# Altium PCB rf_main.PcbDoc (part 3 of 3)
Units mil, origin at the board's own origin, x right, y up, seen from the top; angles counter-clockwise.
Board outline 7331.84 x 2609.86 mil, 2 copper layers (Top Layer, Bottom Layer); 310 components, 184 nets, 868 pads, 739 vias.
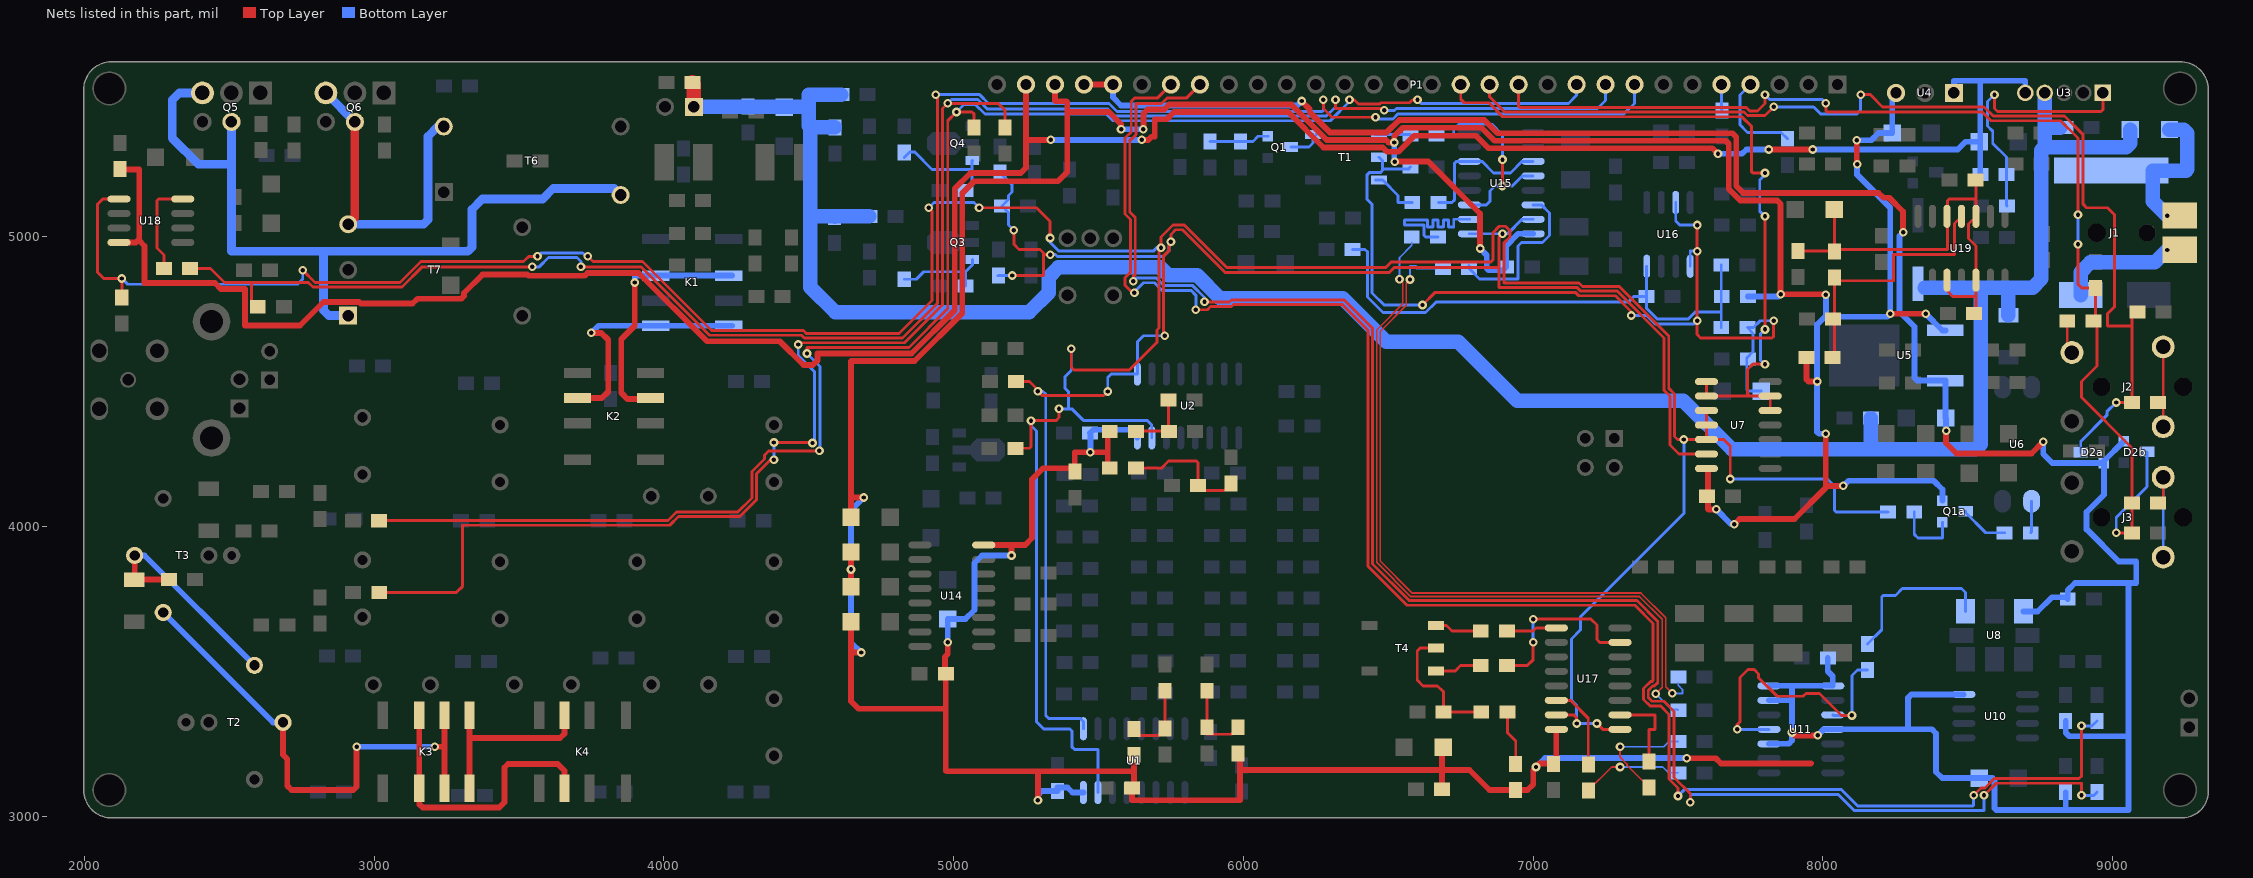
[diagram p3: the nets of this part, all layers, seen from the top]

## Via types
v1: diameter 30, hole 15, Top Layer to Bottom Layer, 739 vias

## Nets (pads, with @x,y where several pads share a name; then routed paths per layer and width w, separated by ;. In a path a pad name is that pad's centre, name@x,y a point inside that pad or via, vN(x,y) a via of type N, cw(c..) or ccw(c..) an arc to the next point about the centre after c; other vN are vias at no path point) (continued)
NetD6_1: D6.1 R61.1 T2.2 T3.3 | length 772.3
  Top Layer w20: T3.3@2174.09,3900 2174.09,3817.41 2291.67,3817.41 R61.1@2292.86,3816.22
  Bottom Layer w20: T3.3@2174.09,3900 2208.33,3900 T2.2@2587.48,3520.85
NetF1_2: F1.2 J1.1 P3.1 | length 491.2
  Bottom Layer w50: v1(9188,5072) 9138,5122 9138,5228.16 9254.16,5228.16 9258,5232 9258,5357.55 9245.78,5369.78 F1.2@9195.86,5369.78
NetJ1_3: J1.3 P3.2 | length 409.4
  Bottom Layer w50: J1.3@8889.83,4798.16 8889.83,4877.83 8923,4911 9145,4911 v1(9188,4954)
NetJ2_R: J2.R R15c.2 | length 116.3
  Top Layer w10: R15c.2@8843.14,4709.78 8843.14,4616.21 J2.R@8859.24,4600.11
NetJ2_T: J2.T R15d.2 | length 275.6
  Top Layer w10: J2.T@9174.2,4344.2 J2.T@9174.2,4619.8
NetJ3_T: J3.T R15b.2 | length 372.3
  Top Layer w10: R15b.2@9156.86,4080.22 9174.2,4097.57 J3.T@9174.2,4169.8
  Bottom Layer w10: J3.T@9174.2,3894.2 J3.T@9174.2,4169.8
NetK1_2: K1.2 K1.7 K2.3 | length 870.7
  Top Layer w20: v1(3900,4841.62) 3900,4693 3853,4646 3853,4461.26 3874.26,4440 3950.99,4440 K2.3@3953.98,4442.99
  Bottom Layer w20: v1(3900,4841.62) 3900,4865.62 K1.7@3972.02,4865.62 K1.2@4223.98,4865.62 K1.2@4235.8,4865.62
NetK1_4: K1.4 K1.5 K2.6 | length 857.9
  Top Layer w20: K2.6@3702.02,4442.99 3785.99,4442.99 3808,4465 3808,4644 3784,4668 v1(3750,4668)
  Bottom Layer w20: v1(3750,4668) 3774.39,4692.39 K1.5@3972.02,4692.39 K1.4@4223.98,4692.39 K1.4@4235.8,4692.39
NetK3_2: K3.2 K3.7 K4.6 | length 1038.4
  Top Layer w20: K3.7@3156.38,3359.8 K3.7@3156.38,3347.98 K3.2@3156.38,3096.02 3156.38,3041.62 3168,3030 3432,3030 3450,3048 3450,3168 3462,3180 3634,3180 3657.01,3156.99 K4.6@3657.01,3096.02 K4.6@3657.01,3084.2
NetK3_3: K3.3 K3.6 T2.3 T3.2 | length 1782.8
  Top Layer w20: T2.3@2685.91,3324 2685.91,3212.09 2700.86,3197.14 2700.86,3105 2715.63,3090.22 2928.22,3090.22 2940,3102 v1(2940,3240) ; v1(3210,3240) 3242.99,3240 ; K3.3@3242.99,3084.2 3242.99,3240 ; K3.6@3242.99,3359.8 3242.99,3240
  Bottom Layer w20: T3.2@2268,3698.63 T3.2@2272.52,3703.15 2651.67,3324 T2.3@2685.91,3324 T2.3@2685.91,3338.09 ; v1(2940,3240) v1(3210,3240)
NetK3_4: K3.4 K3.5 K4.3 | length 684
  Top Layer w20: K3.4@3329.61,3084.2 3329.61,3270 ; K3.5@3329.61,3359.8 3329.61,3270 ; K4.3@3657.01,3359.8 3657.01,3285.01 3642,3270 3329.61,3270
NetQ1_2: Q1.2 R38.2 R39.2 | length 206.4
  Bottom Layer w10: R39.2@5885.22,5328.86 R38.2@5990.22,5328.86 6032.86,5328.86 6050.39,5346.39 Q1.2@6084.34,5346.39
NetQ1_3: Q1.3 T1.6 | length 112
  Bottom Layer w10: Q1.3@6164.34,5309.39 6226.39,5309.39 6239.83,5322.83 T1.6@6239.83,5352.74 ; T1.6@6251.64,5352.74 T1.6@6252.38,5352
NetQ1a_1: Q1a.1 R15a.1 | length 234.1
  Bottom Layer w10: R15a.1@8315.14,4050.22 8315.14,3972.86 8328,3960 8412,3960 8412,4014.05 Q1a.1@8412.34,4014.39
NetQ1a_3: Q1a.3 R15.2 | length 170.1
  Bottom Layer w10: Q1a.3@8492.34,4052.39 8490.22,4050.28 8490.22,4049.78 8561.78,3978.22 R15.2@8627.14,3978.22
NetQ3_3: Q3.3 R77.2 R78.2 | length 322.9
  Bottom Layer w10: R78.2@4829.78,4853.14 4871.14,4853.14 4896.86,4878.86 5040.86,4878.86 ; R77.2@5040.86,4829.78 5040.86,4878.86 ; Q3.3@5064.93,4920.94 5064.93,4902.93 5040.86,4878.86
NetQ4_3: Q4.3 R79.2 R80.2 | length 380
  Bottom Layer w10: R80.2@4829.78,5273.14 4848.63,5292 4866,5292 4926,5232 5064,5232 ; R79.2@5040.86,5159.78 5064,5182.92 5064,5232 ; Q4.3@5064.93,5262.94 5064,5262.02 5064,5232
NetQ5_3: Q5.3 T6.2 T7.1 | length 2750.2
  Bottom Layer w30: Q5.3@2408,5496.06 2328.06,5496.06 2304,5472 2304,5340 2394,5250 2508,5250 ; Q5.3@2508,5396.06 2508,5250 ; T7.1@2910.88,4727.73 2844.27,4727.73 2826,4746 2826,4944 2832,4950 ; T6.2@3851.12,5143.89 3829.01,5166 3618,5166 3582,5130 3373.89,5130 3337.89,5094 3337.89,4963.89 3324,4950 2832,4950 ; 2508,5250 2508,4950 2832,4950
NetQ6_3: Q6.3 T6.3 T7.3 | length 1142.8
  Top Layer w30: T7.3@2910.88,5042.69 2934,5065.81 Q6.3@2934,5396.06
  Bottom Layer w30: Q6.3@2834,5496.06 Q6.3@2934,5396.06 ; T7.3@2910.88,5042.69 3170.69,5042.69 3186,5058 3186,5346 3220.11,5380.11 T6.3@3240.88,5380.11
NetR1a_2: R1a.2 R1b.1 R3a.2 | length 257.9
  Top Layer w10: R1b.1@5622.22,3301.14 5645.37,3278 5704.92,3278 R3a.2@5729.78,3302.86 5730.22,3303.3 R1a.2@5730.22,3433.14
NetR1c_2: R1c.2 R1d.1 R3b.1 | length 268.1
  Top Layer w10: R1c.2@5874.22,3433.14 5874.22,3283 5958.08,3283 R1d.1@5982.22,3307.14
NetR2a_2: R2a.2 R2b.1 R3c.2 | length 218.8
  Top Layer w10: R2a.2@5628.86,4328.22 5630.57,4329.93 5741.14,4329.93 R3c.2@5741.14,4435.78
NetR2c_2: R2c.2 R2d.1 R3d.1 | length 437.6
  Top Layer w10: R2c.2@5628.86,4202.22 5718.22,4202.22 5742,4226 5838,4226 5843.14,4220.86 R2d.1@5843.14,4141.78 5860.92,4124 5932.92,4124 R3d.1@5957.78,4148.86
NetR11_2: R11.2 R12.1 U3.1 | length 898.1
  Top Layer w10: v1(8592,5490) 8592,5442 8602,5432 8960,5432 8965.86,5437.86 U3.1@8965.86,5485.63
  Bottom Layer w10: v1(8592,5490) 8568,5466 8568,5382 8586,5364 8586,5322 8633.14,5274.86 R12.1@8633.14,5214.22 8633.14,5107.49 R11.2@8634.86,5105.78
NetR15_1: R15.1 U6.1 | length 110.1
  Bottom Layer w10: R15.1@8717.14,3978.22 8720,3981.08 U6.1@8720,4087.15
NetR18_1: R18.1 U11.3 U11.11 | length 1038.3
  Top Layer w10: v1(7704,3300) 7704,3316 7714,3326 7714,3478.77 7741.23,3506 7762.77,3506 7778,3490.77 7778,3478 7842,3414 7931.23,3414 7941.23,3424 7988,3424 8064,3348 v1(8100,3348)
  Bottom Layer w10: v1(7704,3300) U11.11@7814,3300 ; U11.3@8034,3350 8036,3348 v1(8100,3348) 8100,3486 8118.86,3504.86 R18.1@8154.22,3504.86
NetR18_2: R18.2 U8.4 | length 554.5
  Bottom Layer w10: R18.2@8154.22,3594.86 8203,3643.63 8203,3757 8208,3762 8250,3762 8274,3786 8478,3786 8492,3772 U8.4@8492,3706.68
NetR41_1: R41.1 T1.1 | length 120.9
  Bottom Layer w10: T1.1@6456.36,5352.74 6575.89,5352.74 R41.1@6576.86,5351.78
NetR41_2: R41.2 U15.3 U15.12 | length 723.4
  Top Layer w10: v1(6893,5175) 6894,5176 v1(6894,5266)
  Bottom Layer w10: R41.2@6666.86,5351.78 6719.78,5351.78 6726,5358 6726,5370 6744,5388 6857,5388 6894,5351 v1(6894,5266) ; U15.3@6780,5110 6839,5110 6851,5122 6851,5158 6868,5175 v1(6893,5175) 6928,5175 6963,5210 U15.12@7000,5210
NetR42_1: R42.1 T1.3 | length 172.6
  Bottom Layer w10: T1.3@6456.36,5195.26 6480.74,5195.26 6534,5142 6534,5118 6582.63,5118 R42.1@6582.86,5117.78
NetR42_2: R42.2 U15.6 U15.11 | length 493
  Bottom Layer w10: R42.2@6672.86,5117.78 6719.78,5117.78 6728,5126 6728,5252 6736,5260 U15.6@6780,5260 6823,5260 6863,5220 6922,5220 6962,5260 U15.11@7000,5260
NetR67_1: R67.1 U17.9 | length 180.4
  Top Layer w10: R67.1@6912.92,3636 R67.1@6909.14,3639.78 6999.78,3639.78 7010,3650 U17.9@7080,3650
NetR67_2: R67.2 T4.3 | length 162.8
  Top Layer w10: T4.3@6664.17,3658.74 6701.26,3658.74 6720.22,3639.78 R67.2@6819.14,3639.78
NetR68_1: R68.1 U17.7 | length 601.7
  Top Layer w10: R68.1@6909.14,3519.78 6979.78,3519.78 7000,3540 v1(7000,3600) ; v1(7000,3680) 7200,3680 7220,3660 7220,3610 7230,3600 U17.7@7300,3600
  Bottom Layer w10: v1(7000,3600) v1(7000,3680)
NetR68_2: R68.2 T4.1 | length 162.6
  Top Layer w10: T4.1@6664.17,3501.26 6731.26,3501.26 6749.78,3519.78 R68.2@6819.14,3519.78
NetR69_2: R69.2 R70.1 T4.2 | length 475
  Top Layer w10: T4.2@6664.17,3580 6610,3580 6600,3570 6600,3470 6620,3450 6670,3450 6690,3430 6690,3361.08 R69.2@6690.86,3360.22 R70.1@6820.86,3360.22
NetR70_2: R70.2 RFC4.2 | length 191.5
  Top Layer w10: R70.2@6910.86,3360.22 6910.86,3289.14 6940,3260 6940,3181.08 RFC4.2@6939.78,3180.86
NetR83_1: R83.1 U18.4 | length 335.8
  Top Layer w10: R83.1@2274.86,4890.22 2274.86,4937.14 2250.86,4961.14 2250.86,5124.86 2256,5130 U18.4@2340,5130
OUT_I: P1.5 R46.2 | length 91.3
  Bottom Layer w10: P1.5@7649.14,5524.14 P1.5@7650,5525 7650,5438.08 R46.2@7652.22,5435.86
OUT_Q: P1.4 R47.2 | length 337.1
  Bottom Layer w10: P1.4@7750,5525 7714,5489 7714,5386 7740,5360 7855.08,5360 R47.2@7877.22,5337.86
P_DAH: C32.2 C33b.1 D2b.3 P1.12 R15b.1 R15c.1 | length 4025.1
  Top Layer w10: P1.12@6950,5525 6950,5450 6954,5446 7735.23,5446 7747.23,5434 7774,5434 7800,5460 v1(7800,5490) ; v1(8010,5460) 8010,5435 8015,5430 8550,5430 8580,5400 8820,5400 8880,5340 v1(8880,5076) ; v1(8880,4974) 8880,4836 8892.86,4823.14 C32.2@8940.22,4823.14 8940.22,4716.86 R15c.1@8933.14,4709.78 8946,4696.92 8946,4554 8892,4500 8892,4446 9066.86,4271.14 R15b.1@9066.86,4080.22 C33b.1@9066.86,3978.22 9066.63,3978 v1(9012,3978)
  Bottom Layer w10: v1(7800,5490) 7816,5474 7996,5474 v1(8010,5460) ; v1(8880,4974) v1(8880,5076) ; v1(9012,3978) 9012,4031 9118.34,4137.34 D2b.3@9118.34,4257.39
P_DIT: C33.1 D2a.3 P1.13 R15d.1 | length 3695.3
  Top Layer w10: P1.13@6850,5525 6850,5481.88 6901.88,5430 7728,5430 7740,5418 7800,5418 v1(7830,5448) ; v1(8130,5490) 8164,5490 8206,5448 8556,5448 8588,5416 8834,5416 8898,5352 8898,5112 8910,5100 8982,5100 9006,5076 9006,4758.05 8982,4734.05 8982,4692 9066.86,4692 ; v1(9012,4428) 9066.63,4428 R15d.1@9066.86,4428.22 9066.86,4692 ; C33.1@9084.86,4740.22 9066.86,4722.22 9066.86,4692
  Bottom Layer w10: v1(7830,5448) 7968,5448 7992,5424 8118,5424 8130,5436 v1(8130,5490) ; D2a.3@8889.66,4255.61 8889.66,4293.66 8979.61,4383.61 8979.61,4395.61 v1(9012,4428)
PA_BIAS: C103.1 P1.8 R83.2 | length 6244.8
  Top Layer w10: R83.2@2364.86,4890.22 2435.78,4890.22 2484,4842 2567,4842 2576.78,4842 ; C103.1@2598.86,4758.22 2576.78,4780.3 2576.78,4842 ; v1(3546,4896) 3166.63,4896 3096.63,4826 2789.37,4826 2773.37,4842 2576.78,4842 ; v1(3714,4896) 3921.77,4896 4157.77,4660 4475,4660 4485,4650 4824,4650 4944,4770 4944,5484 v1(4938,5490) ; v1(6276,5472) 6276,5442 6306,5412 v1(6456,5412)
  Bottom Layer w10: v1(3546,4896) 3570,4896 3602,4928 3700,4928 3714,4914 v1(3714,4896) ; v1(4938,5490) 5090,5490 5120,5460 5536,5460 5564,5432 6272,5432 6276,5436 v1(6276,5472) ; v1(6456,5412) 6462,5406 6516,5406 6534,5424 7314,5424 7350,5460 P1.8@7350,5525
PTT: C2c.1 C94a.1 R73.2 R75.1 U1.1 U2.1 U7.13 U15.1 U15.15 | length 6300.5
  Top Layer w10: v1(5202,4866) 5310,4866 5310,4944 5298,4956 5226,4956 5208,4974 v1(5208,5022) ; C2c.1@5215.14,4499.78 5262.22,4499.78 5284,4478 5284,4474 5306,4452 5518,4452 v1(5532,4466) ; 5310,4938 v1@5328,4938 ; v1@5328,4932 v1(5334,4938) ; v1(5729,4658) 5725,4662 5725,4934.23 5744,4953.23 5744,4977 v1(5750,4983) 5750,5008 5766,5024 5789.49,5024 5936.49,4877 6504,4877 6520,4893 6882,4893 ; v1(6894,5010) 6882,4998 6882,4893 ; U7.13@7598,4250 7503,4250 7472,4281 7472,4450 7452,4470 7452,4650.77 7290.77,4812 7164,4812 7152,4824 6882,4824 6882,4893
  Bottom Layer w10: R73.2@5153.78,4865.14 5154.63,4866 v1(5202,4866) ; R75.1@5160.22,5220.86 5202,5179.08 5202,5154 5190,5142 5190,5128.92 C94a.1@5166.86,5105.78 5190,5082.63 5190,5040 v1(5208,5022) ; v1@5292,4466 5309,4466 5318,4457 5318,3348 5328,3338 5436,3338 5448,3326 U1.1@5448,3302 ; v1(5334,4938) 5352,4938 5358,4932 5724,4932 5743,4951 5743,4967 5750,4974 v1(5750,4983) ; v1(5532,4466) 5532,4514 5544,4526 U2.1@5634,4526 5634,4637 5655.22,4658.22 5681.14,4658.22 5681.37,4658 v1(5729,4658) ; U15.1@6780,5010 v1(6894,5010) 6912,5010 6962,5060 U15.15@7000,5060
  other v1: 5291,4467
PTT_3V: P1.14 U7.5 U7.6 U7.8 U7.9 | length 2469.2
  Top Layer w10: P1.14@6750,5525 6750,5474 6762,5462 6847.25,5462 6895.25,5414 7720,5414 7754,5380 7754,5224 7758,5220 v1(7800,5220) ; U7.8@7598,4500 U7.9@7598,4450 7748,4450 ; v1(7800,4560) 7758,4560 7740,4542 7740,4458 7748,4450 ; v1(7800,4680) v1(7800,5070) ; U7.5@7818,4400 U7.6@7818,4450 7748,4450
  Bottom Layer w10: v1(7800,4560) 7798.86,4560 7784,4574.86 7784,4664 v1(7800,4680) ; v1(7800,5070) 7782,5088 7782,5196 7800,5214 v1(7800,5220)
PTT_N: C2d.1 C102.2 R15a.2 U1.15 U2.15 U7.10 U7.11 U7.12 U17.1 U17.15 U18.5 | length 12976.8
  Top Layer w10: U18.5@2120,5130 2064,5130 2046,5112 2046,4877 2067.09,4855.91 v1(2130,4855.91) 2130,4791.3 C102.2@2129.56,4790.86 ; v1(2754,4884) 2796,4842 3090,4842 3162,4914 3516,4914 3534,4932 v1(3564,4932) ; v1(3738,4932) 3756,4914 3926.4,4914 4164.4,4676 4481.63,4676 4491.63,4666 4812,4666 4926,4780 4926,5088 v1(4914,5100) ; v1(5088,5100) 5286,5100 5333.01,5052.99 v1(5333.01,4995.22) ; C2d.1@5213.14,4269.78 5261.78,4269.78 5267,4275 v1(5267,4365) 5353,4365 5364,4376 v1(5364,4406) ; v1(5406,4613) 5406,4550 5416,4540 5606.37,4540 5702,4635.63 5702,4678 5709,4685 5709,4955 v1(5716,4962) 5716,4999 5757,5040 5796.12,5040 5943.12,4893 6490,4893 6509,4912 6853,4912 6862,4921 6862,5014.77 6883.23,5036 6904.77,5036 6907.38,5033.38 6920,5020.77 6920,4999.23 6900,4979.23 6900,4840 7158.63,4840 7170.63,4828 7297.4,4828 7468,4657.4 7468,4476.63 7488,4456.63 7488,4310 7498,4300 v1(7520,4300) U7.12@7598,4300 ; U17.15@7080,3350 7140,3350 7150,3340 v1(7150,3320) ; v1(7220,3320) 7240,3300 U17.1@7300,3300 ; U7.10@7598,4400 U7.11@7598,4350 U7.12@7598,4300 ; v1(7680,4164) 7680,4278 7658,4300 U7.12@7598,4300
  Bottom Layer w10: v1(2130,4855.91) 2149.91,4836 2162,4836 2736,4836 2754,4854 v1(2754,4884) ; v1(3564,4932) 3576,4944 3720,4944 3732,4932 v1(3738,4932) ; v1(4914,5100) 4932,5118 5070,5118 v1(5088,5100) ; v1(5267,4365) 5267,4348 5286,4329 5286,3326 5311.27,3300.73 5401.27,3300.73 5408,3294 5408,3240 5418,3230 5498,3230 U1.15@5498,3082 ; v1(5333.01,4995.22) 5333.01,4980.99 5364,4950 5689,4950 5701,4962 v1(5716,4962) ; v1(5364,4406) 5396,4406 ; v1(5406,4613) 5406,4537.74 5385,4516.74 5385,4477 5396,4466 5396,4406 ; U2.15@5684,4306 5684,4350 5667.78,4366.22 5447.68,4366.22 5407.9,4406 5396,4406 ; v1(7220,3320) v1(7150,3320) 7150,3383.23 7132,3401.23 7132,3612 7164,3644 7164,3689.25 7520,4045.25 v1(7520,4300) ; v1(7680,4164) 8016,4164 8040,4140 8040,4056 8046,4050 8224.92,4050 R15a.2@8225.14,4050.22
PWR_FWD: C28a.2 P1.10 RFC10.1 | length 5672.1
  Top Layer w10: RFC10.1@3017.14,4019.78 3017.59,4020.22 4014.22,4020.22 4044,4050 4255.37,4050 4304,4098.63 4304,4190 4347,4233 4347,4246 4361,4260 4536,4260 v1(4537,4261) ; v1(4494,4597) 4494,4617 4495,4618 4846,4618 4980,4752 4980,5400 v1(5010,5430) 5064,5430 5069.78,5424.22 C28a.2@5069.78,5376.86 ; v1@6367,5473 v1(6366,5472) 6383,5472 6397,5458 6471.23,5458 6475.23,5462 6573,5462 6583,5472 v1(6601,5472)
  Bottom Layer w10: v1(4494,4597) 4539,4552 4539,4263 v1(4537,4261) ; v1(5010,5430) 5036,5456 5075,5456 5108,5423 5526.75,5423 5549.75,5400 6300,5400 6366,5466 v1(6366,5472) ; v1(6601,5472) 6613,5460 7122,5460 7150,5488 P1.10@7150,5525
PWR_RET: C29a.2 P1.9 RFC11.1 | length 6261.7
  Top Layer w10: RFC11.1@3018.59,3773.22 RFC11.1@3018.14,3772.78 3284.78,3772.78 3306,3794 3306,4004.22 4020.85,4004.22 4050.63,4034 4262,4034 4320,4092 4320,4182 4368,4230 v1(4380,4230) ; v1(4380,4290) 4511,4290 v1(4513,4288) ; v1(4464,4628) 4470,4634 4831,4634 4962,4765 4962,5442 v1(4980,5460) 5154,5460 5177.78,5436.22 C29a.2@5177.78,5376.86 ; v1(6318,5472) 6318,5442 6480,5442 v1@6480,5430
  Bottom Layer w10: v1(4380,4230) v1(4380,4290) ; v1(4464,4628) 4464,4590 4520,4534 4520,4295 v1(4513,4288) ; v1(4980,5460) 4993,5473 5084.37,5473 5117.37,5440 5532.37,5440 5556.37,5416 6286,5416 6318,5448 v1(6318,5472) ; v1@6480,5430 v1(6486,5436) 6522,5436 6528,5442 7222,5442 7250,5470 P1.9@7250,5525
QSD_BIAS: C75.2 C76.1 R49.1 R50.2 T1.2 U16.3 U16.5 | length 3148.6
  Top Layer w10: v1(6618,4764) 6662,4808 7145.37,4808 7157.37,4796 7284,4796 7338,4742 v1(7338,4728) ; v1(7566,5040) v1(7566,4950) v1(7566,4710) 7566,4662 7578,4650 7824,4650 7830,4656 v1(7830,4710)
  Bottom Layer w10: T1.2@6468.17,5274 6480,5262.17 6480,5236 ; C75.2@6576.14,5240.22 6568.92,5233 6483,5233 6480,5236 ; v1(6618,4764) 6486,4764 6444,4806 6444,5112 6426,5130 6426,5211.95 6436.06,5222.01 6474,5222.01 6480,5228.01 6480,5236 ; v1(7338,4728) 7392,4728 7422,4698 7554,4698 v1(7566,4710) ; U16.3@7492,5118 7492,5054 7506,5040 v1(7566,5040) ; U16.5@7542,4898 7542,4950 v1(7566,4950) ; C76.1@7787.14,4467.22 7742.97,4467.22 7737,4473.19 7737,4581.63 7759,4603.63 7759,4666.37 R49.1@7739.14,4686.22 7760.22,4686.22 7784,4710 v1(7830,4710)
RX_CLK_N: R22.1 R51.2 | length 2572
  Top Layer w6: v1(6575,4852) 6562,4839 6562,4763 6472,4673 6472,3881 6583,3770 7371.97,3770 7457.5,3684.47 7457.5,3446.5 v1(7480,3424)
  Bottom Layer w6: v1(6575,4852) 6575,4899 6597,4899 6597,4890.22 R51.2@6664,4890.22 ; v1(7480,3424) 7515,3424 7515,3437.33 7500.86,3451.48 R22.1@7500.86,3460
RX_CLK_N_L: R51.1 U15.14 | length 577
  Bottom Layer w10: R51.1@6779.14,4901.14 R51.1@6779.14,4890.22 6815.14,4854.22 6948,4854.22 6948,4968 6960,4980 7032,4980 7056,5004 7056,5082 7028,5110 U15.14@7000,5110
RX_CLK_P: R23.1 R52.2 | length 2598.5
  Top Layer w6: v1(6539,4853) 6550,4842 6550,4767.97 6463.51,4681.49 6460,4677.97 6460,3876.03 6463.51,3872.51 6578.03,3758 7367,3758 7445.5,3679.5 7445.5,3445.5 v1(7423,3423)
  Bottom Layer w6: v1(6539,4853) 6539,4890.22 6539,4899 6539,4928.08 6581.14,4970.22 R52.2@6581.14,4981 ; v1(7423,3423) 7477.22,3368.78 7497.86,3368.78 R23.1@7500.86,3365.78
RX_CLK_P_L: R52.1 U15.2 | length 541.3
  Bottom Layer w10: R52.1@6671.14,4998.22 6630.22,4998.22 6624,5004.44 6624,5040 6556,5040 6556,5058 6636,5058 6636,5034 6654,5034 6654,5058 6672,5058 6672,5034 6690,5034 6690,5058 6708,5058 6708,5034 6726,5034 6726,5060 U15.2@6780,5060
RXD_A5V: C72.2 C77.2 R35.1 R49.2 RFC1.1 U16.8 | length 1864.2
  Bottom Layer w10: R35.1@6377.14,4956.22 6419.78,4956.22 6428,4948 6428,4792 6482,4738 6628.77,4738 6664.77,4774 7328,4774 7348.22,4794.22 C72.2@7391.14,4794.22 ; U16.8@7392,4898 7391.14,4897.14 C72.2@7391.14,4794.22 ; R49.2@7649.14,4686.22 7649.14,4740 ; C77.2@7649.14,4902.22 7649.14,4740 ; C72.2@7391.14,4794.22 7391.14,4752.86 7428,4716 7536,4716 7536,4716.77 7559.23,4740 7649.14,4740
SC_A5V: C129.2 R100.2 RFC9.1 U19.4 | length 928.6
  Top Layer w10: RFC9.1@8033.14,4583.78 8040.22,4590.86 R100.2@8040.22,4859.14 8051.37,4848 8244,4848 8244,4938 8454,4938 8454,5046 U19.4@8478,5070
SCL: P1.23 R17.2 | length 5974
  Top Layer w10: v1(5620,4846) 5620,4863.37 5627,4870.37 5627,5066.33 5608,5085.33 5608,5331 5629,5352 5629,5460 5718,5460 5736,5478 5803,5478 P1.23@5850,5525 ; v1(5866,4775) 5952,4775 5959,4782 6348,4782 6446,4684 6446,3870.23 6572.23,3744 7358,3744 7430,3672 7430,3461 7418,3449 7412.23,3449 7397,3433.77 7397,3410 7410,3397 7451,3397 7486,3362 7486,3134 7542,3078 v1(7542,3048) ; v1(8556,3072) 8598,3114 8892,3114 v1(8892,3072)
  Bottom Layer w10: v1(5620,4846) 5632,4858 5698.63,4858 5725.63,4831 5825.63,4831 5866,4790.63 v1(5866,4775) ; v1(7542,3048) 7542,3075 8053,3075 8108,3020 8556,3020 v1(8556,3072) ; v1(8892,3072) 8934.63,3072 R17.2@8945.78,3083.14
SDA: P1.24 R16.2 | length 6083.7
  Top Layer w10: v1(5624,4806) 5618,4806 5591,4833 5591,4857 5611,4877 5611,5059.7 5592,5078.7 5592,5340.3 5613,5361.3 5613,5466.63 5624.37,5478 5703,5478 P1.24@5750,5525 ; v1(5836,4748) 5875.77,4748 5886.77,4759 5958.63,4759 5965.63,4766 6341.37,4766 6430,4677.37 6430,3863 6565,3728 7351,3728 7414,3665 7414,3468 7411,3465 7405.6,3465 7381,3440.4 7381,3403.37 7403.37,3381 7439,3381 7469,3351 7469,3128.37 7500,3097.37 v1(7500,3070) ; v1(8520,3072) 8520,3072.77 8545.23,3098 8559.37,3098 8591.37,3130 8884,3130 8892,3138 v1(8892,3312)
  Bottom Layer w10: v1(5624,4806) 5624,4810 5655,4841 5693,4841 5720,4814 5820,4814 5836,4798 v1(5836,4748) ; v1(7500,3070) 7523,3093 8062,3093 8119,3036 8518,3036 8520,3038 v1(8520,3072) ; v1(8892,3312) 8928.63,3312 R16.2@8945.78,3329.14
TX_CLK_N: R25.1 R72.2 | length 390.6
  Top Layer w6: v1(7300,3240) 7300,3203.94 7324,3179.94 7324,3175.37 R72.2@7400.22,3099.14
  Bottom Layer w6: v1(7300,3240) 7450.08,3240 7467.86,3257.78 R25.1@7500.86,3257.78
TX_CLK_N_L: R72.1 U17.2 | length 249.8
  Top Layer w10: U17.2@7330,3350 7420,3350 7420,3300 7400.22,3300 R72.1@7400.22,3210
TX_CLK_P: R24.1 R71.2 | length 352.5
  Top Layer w6: R71.2@7190.22,3089.14 7271.08,3170 v1(7300,3170)
  Bottom Layer w6: v1(7300,3170) 7447.63,3170 7467.86,3149.78 R24.1@7500.86,3149.78
TX_CLK_P_L: R71.1 U17.14 | length 244
  Top Layer w10: U17.14@7110,3400 7128.46,3400 7190.22,3338.24 R71.1@7190.22,3200
TX_OA_BIAS: C126.2 C127.2 C128.1 R100.1 R101.2 U19.3 U19.5 U19.10 U19.12 | length 1552.2
  Top Layer w10: R101.2@7913.78,4950.86 8038.51,4950.86 R100.1@8040.22,4949.14 8040.22,5074.7 C128.1@8033.14,5081.78 ; R100.1@8040.22,4956 8430,4956 8430,5124 8436,5130 8528,5130 ; U19.10@8428,4850 8428,4814 8448,4794 8528,4794 ; C127.2@8520.86,4734.22 8528,4741.37 8528,4794 ; C126.2@8526.86,5196.22 8528,5195.08 8528,5130 ; 8528,4794 U19.12@8528,4850 8528,4968 8502,4994 8502,5044 U19.3@8528,5070 8528,5130
VCC_3V: C29.1 C36.1 C40.1 C42.2 D2a.2 D2b.2 P1.26 P1.27 R20.2 R21.2 U5.3 U8.6 U10.8 U11.1 U11.4 U11.10 U11.13 U11.14 | length 9355.3
  Top Layer w20: P1.27@5450,5525 P1.26@5550,5525 ; v1(6201,5468) 6229,5440 6229,5429.3 6298.3,5360 6495,5360 6538,5403 6831.3,5403 6877.3,5357 7688,5357 7701,5344 7701,5175.3 7725.3,5151 8192,5151 8209,5134 8229,5134 8276,5087 v1@8276,5014 ; v1(7893,3289) 7903,3279 v1(7982,3279) ; v1(8425,4330) 8425,4288 8461,4252 8720,4252 v1(8760,4292)
  Bottom Layer w20: P1.26@5550,5525 5550,5481 5578,5453 6186,5453 v1(6201,5468) ; U11.10@7814,3250 7882,3250 7893,3261 v1(7893,3289) 7893,3401 ; U11.13@7814,3400 7892,3400 7893,3401 ; U11.14@7814,3450 7893,3450 ; v1(7982,3279) 8003,3300 U11.4@8034,3300 8294,3300 ; C42.2@8016.86,3545.78 8016.86,3500.14 8034,3483 U11.1@8034,3450 7893,3450 ; v1(8277,5015) 8264,5002 8264,4741 8316,4689 8316,4513 8325.61,4503.39 U5.3@8422.47,4503.39 8422.47,4374.89 C29.1@8423.14,4374.22 8425,4372.37 v1(8425,4330) ; U10.8@8486.17,3420.61 8305.72,3420.61 8294,3408.89 8294,3300 ; U8.6@8692,3706.68 8740.68,3706.68 8790,3756 8838.63,3756 C36.1@8844.86,3749.78 8844.86,3779.86 8870,3805 9081,3805 9081,3879 9021,3879 8910,3990 8910,4050 8969.66,4109.66 D2a.2@8969.66,4218.61 ; v1(8760,4292) 8760,4250 8791.39,4218.61 D2a.2@8969.66,4218.61 ; R20.2@8837.78,3083.14 8837.78,3021.91 ; R21.2@8837.78,3329.14 8837.78,3288.22 8850,3276 9054,3276 ; D2b.2@9038.34,4294.39 8969.66,4225.71 D2a.2@8969.66,4218.61 ; 9054,3802 9054,3276 ; 7893,3401 7893,3450 ; 8294,3300 8376,3300 8390.34,3285.66 8390.34,3153 8411.56,3131.78 C40.1@8538.86,3131.78 8585.22,3131.78 8592,3125 8592,3027.91 8598,3021.91 8837.78,3021.91 ; 8837.78,3021.91 9054,3021.91 9054,3276
VCC_5V: C1a.1 C1b.1 C25.1 C26.1 C28.1 C34.1 C63a.1 C67.1 C88.2 C89.2 C90.1 P1.28 Q1a.2 R1b.2 R1d.2 R2a.1 R2c.1 R31.2 R32.2 R33.2 R34.2 R102.1 RFC1.2 RFC4.1 RFC9.2 U1.16 U2.16 U4.3 U5.1 U7.14 U14.16 U15.16 U17.16 | length 17216.9
  Top Layer w20: R34.2@4646.14,3671.78 4646,3671.63 4646,3565 ; R33.2@4646.14,3791.78 v1(4646.14,3851.78) R32.2@4646.14,3911.78 ; R31.2@4646.14,4031.78 4646.14,4100 ; v1(4681,3565) 4646,3565 ; v1(4690,4100) 4646.14,4100 ; v1(4980,3600) 4980,3560 4970,3550 4970,3494.92 C63a.1@4973.14,3491.78 4973.14,3371 ; U14.16@5104,3936 5198,3936 ; v1(5200,3900) 5200,3934 5198,3936 ; v1(5291,3055) 5291,3154 5292,3155 ; v1@5292,3056 v1@5293,3055 ; P1.28@5350,5525 5350,5469 5352,5467 5390,5467 5392,5465 5392,5223 5360,5191 5071,5191 5030,5150 5030,4735.53 4865.47,4571 4647,4571 4646.14,4570.14 4646.14,4100 ; 5392,5430 5536,5430 5578,5388 v1(5578,5371) ; 5496,4256 v1(5472,4256) 5418,4256 5418.22,4255.78 C1b.1@5418.22,4189.14 5406.37,4201 5309,4201 5271,4163 5271,3960 5247,3936 5198,3936 ; 5498,4256 5532,4256 ; R2c.1@5538.86,4202.22 5532,4209.08 5532,4256 ; R2a.1@5538.86,4328.22 5532,4321.37 5532,4256 ; R1b.2@5622.22,3211.14 5622.22,3155 ; v1(5655,5371) 5655,5425 5669,5439 5726.7,5439 5743.7,5456 6165.53,5456 6287.53,5334 6491.77,5334 6500.77,5325 v1(6521,5325) 6521,5347 6550,5376 6821.53,5376 6866.53,5331 7665,5331 7675,5321 7675,5164.53 7714.53,5125 7842,5125 7854,5113 v1(7854,4801) 8009,4801 v1(8010,4800) ; R1d.2@5982.22,3217.14 5988,3211.37 5988,3055 5616,3055 5616,3098.63 5622.22,3104.86 5622.22,3155 ; 5988,3160 6685.86,3160 ; v1(6522,5259) 6638,5259 6817,5080 v1(6817,4959) ; C89.2@6685.86,3093.22 6685.86,3160 ; C90.1@6689.14,3237.78 6685.86,3234.49 6685.86,3160 ; C88.2@7065.78,3181.86 7021.86,3181.86 7000,3160 7000,3110 6980.86,3090.86 RFC4.1@6939.78,3090.86 6849.14,3090.86 6780,3160 6685.86,3160 ; C88.2@7080,3196.08 7080,3286 ; v1(7530,3200) 7630,3200 7648.14,3181.86 7957.86,3181.86 7959,3183 ; U7.14@7598,4200 7602.86,4195.14 7602.86,4116.22 7602.86,4061.14 7605,4059 v1(7632,4059) ; v1(7694,4008) 7712,4026 7902,4026 8010,4134 v1(8010,4320) ; RFC9.2@7943.14,4583.78 7943.14,4506.86 7950,4500 v1(7980,4500) ; 8010,4140 v1(8070,4140) ; v1(8117,5333) 8117,5251 v1(8118,5250) ; v1(8232,4734) v1(8355,4734) ; 4646,3565 4646,3397 4672,3371 4973.14,3371 ; 4973.14,3371 4973.14,3157 4975.14,3155 5292,3155 ; 5292,3155 5622.22,3155
  Bottom Layer w20: v1(4681,3565) 4646,3600 4646,3851.63 v1(4646.14,3851.78) 4646.14,4056.14 v1(4690,4100) ; v1(4980,3600) 4980,3680.63 5040.63,3680.63 5072,3712 5072,3874 5098,3900 v1(5200,3900) ; v1@5292,3056 5292,3074 5304.86,3086.86 C25.1@5358.22,3086.86 ; C25.1@5358.22,3098.86 5393.14,3098.86 5410,3082 U1.16@5448,3082 ; v1(5472,4256) 5472,4321.37 C26.1@5471.14,4322.22 5482.92,4334 5622,4334 5634,4322 U2.16@5634,4306 ; v1(5578,5371) v1(5655,5371) ; v1(6521,5325) 6521,5260 v1(6522,5259) ; v1(6817,4959) 6840,4936 6840,4890 6846,4884 6895.08,4884 C67.1@6906.86,4895.78 6906.86,4968.86 6948,5010 U15.16@7000,5010 ; v1(7010,3170) 7041,3201 7529,3201 v1(7530,3200) ; v1(7632,4059) 7683,4008 v1(7694,4008) ; RFC1.2@7740.86,4793.78 7846.78,4793.78 v1(7854,4801) ; v1(8010,4320) 7986,4320 7980,4326 v1(7980,4500) 7980,4697 8011,4728 ; v1(8010,4800) 8011,4799 8011,4724 8222,4724 v1(8232,4734) 8232,5100 8118,5214 v1(8118,5250) ; v1(8070,4140) 8088,4158 8382,4158 8412.34,4127.66 Q1a.2@8412.34,4089.39 ; v1(8117,5333) 8167,5333 8191.78,5357.78 C28.1@8238.86,5357.78 8238.86,5482.92 U4.3@8252,5496.06 ; v1(8355,4734) 8412.39,4676.61 U5.1@8422.47,4676.61
VCC_8V: C30.1 C93.1 P1.29 R12.2 U3.5 U4.1 U18.8 | length 8922
  Top Layer w20: U18.8@2120,4980 2178,4980 2187,4989 2208,4968 2208,4840 2451.43,4840 2472.43,4819 2554.63,4819 2554.63,4693.22 2744.22,4693.22 2825.73,4774.73 2948.51,4774.73 2954.24,4769 3132.84,4769 3149.98,4786.14 3300.85,4786.14 3310.22,4795.52 3310.22,4805.22 3374,4869 3529.16,4869 3533.16,4865 3726.84,4865 3736.84,4875 3913.08,4875 4149.08,4639 4400,4639 4482,4557 4514,4557 4530,4573 4530,4597 4854.7,4597 5004,4746.3 5004,5166 5058,5220 5232,5220 5250,5238 5250,5335 ; C93.1@2123.78,5232.86 2124.63,5232 2190,5232 2190,4992 ; P1.29@5250,5525 5250,5335 ; v1(5335,5334) 5251,5334 5250,5335 ; v1(5649,5334) 5672,5334 5683,5345 5694,5345 5694,5404 5695,5405 5736,5405 5761,5430 6154.76,5430 6276.76,5308 6481,5308 6496,5293 6535,5293 6590,5348 6803,5348 6846,5305 7619,5305 v1(7638,5286) ; v1(7812.47,5301) v1(7965,5301)
  Bottom Layer w20: v1(5335,5334) v1(5649,5334) ; v1(7638,5286) 7721,5286 7736,5301 v1(7812.47,5301) ; v1(7965,5301) 8465,5301 8491.78,5327.78 C30.1@8538.86,5327.78 ; U4.1@8452,5485.63 U4.1@8452,5496.06 8452,5538 8543.14,5538 ; R12.2@8543.14,5214.22 8543.14,5538 ; U3.5@8698.14,5485.63 U3.5@8698.14,5496.06 8698.14,5538 8543.14,5538
VCC_12V: C27.1 C97.1 C98.2 C104.2 C105.1 D1.2 F1.1 R9.2 R13.1 R83a.2 RFC5.2 RFC6.2 RFC8.1 U3.4 | length 8200.3
  Top Layer w50: R83a.2@4098.86,5532.22 4104,5527.08 RFC8.1@4104,5448
  Bottom Layer w50: RFC8.1@4104,5448 4500,5448 ; C98.2@4590.22,5376.86 4505.14,5376.86 4500,5382 ; RFC6.2@4613.14,5490.22 4612.92,5490 4500,5490 4500,5448 ; RFC5.2@4709.14,5070.22 4590.86,5070.22 4589.78,5069.14 4588.92,5070 4506,5070 ; R13.1@8165.14,4374.22 8165.14,4271.14 8170.29,4266 ; 8352,4824 8544,4824 ; D1.2@8640.23,4729.46 8639.78,4729.91 8639.78,4823.78 ; U3.4@8765.07,5485.63 8765.07,5394 ; R9.2@8818.92,5376 8783.07,5376 8765.07,5394 ; F1.1@9060.86,5369.78 9060.86,5322.86 9047.07,5309.07 8765.07,5309.07 ; 4500,5382 4506,5376 4506,5070 ; 4500,5382 4500,5448 ; 4506,5070 4506,4826 4592,4740 5261,4740 5328,4807 5328,4860 5362,4894 5713.54,4894 5740.54,4867 5840.54,4867 5919.54,4788 6343,4788 6493,4638 6741,4638 6945,4434 7518,4434 7686,4266 8170.29,4266 ; 8170.29,4266 8526,4266 8544,4284 8544,4824 ; 8544,4824 8640,4824 8639.78,4823.78 ; 8639.78,4823.78 8723.78,4823.78 8754,4854 8754,5298 8765.07,5309.07 ; 8765.07,5309.07 8765.07,5394
pads on no net: J1.0 J2.0 J3.0 P1.7 P1.20 P1.21 P1.22 P7.1 P7.2 P8.1 P8.2 P8.3 P8.4 U8.2 U8.5 U10.3 U14.5 U14.6 U14.7 U14.9 U14.10 U14.11 U15.4 U15.5 U15.10 U15.13

## Polygon pours and split planes (outlines as drawn)
GND on Top Layer "GND_L01_P018" (solid, remove dead copper, pour order 18): 1995,5605 1993,2991.09 9329.81,2991.09 9329.92,5606.1
GND on Bottom Layer "GND_L02_P016" (solid, remove dead copper, pour order 16): 1995,5605 1993,2990 9329.81,2990 9329.92,5605

## Keep-outs
Keep-Out Layer:
  lines w11.81: 2004,3088.94 ccw(c2094.65,3090.65) 2096.36,3000 9240.05,3000 ; 2004,3090 2004,5505.64 cw(c2094.65,5507.35) 2092.94,5598 ; 2094,5598.02 9231.64,5598.02 cw(c9233.35,5507.35) 9324,5509.06 9325,3083.3 ; 9240,3000 ccw(c9238.38,3085.55) 9323.93,3087.16

## Other copper
Bottom Layer:
  region net NetC78_1: 3870,5190 4020,5340 4020,5112 3900,5112 3900,5190 3726,5190
  region net NetC78_1: 3870,5190 3726,5190 3726,5340 4020,5340
  region net NetC81_2: 4110,5400 4110,5190 4344,5190 4344,5310 4254,5310 4254,5400

## Silkscreen, mask and mechanical layers (free items; w line width, h text height)
Top Overlay:
  lines w10: 2022,3498 3288,3498 3288,4416 2365,4416 ; 2363,4578 3168,4578 ; 2871,3499 2871,3571 3288,3571 ; 2942.23,4583.22 2942.23,4655.22 ; 2946,4656 3162,4656 ; 3168,4584 3168,5574 ; 3354,5580 3354,4674 4632,4674 ; 3360,4776 3880.63,4776 ; 3880.63,4679.73 3880.63,4775.73 ; 4632,5580 4632,4674 ; 5164,3021 5164,3094 5282,3094 ; 5285,3021 5285,3561 ; 5291,3941 5291,4672 ; 6174,3021 6174,3094 ; 6176,3094 6294,3094 ; 6295,4674 4632,4674 ; 6296,3020 6296,4674 ; 6297,3815 7305,3815 7305,3981 7321,3997 7890,3997 ; 6742,3748 6742,3814 ; 6743,3746 7016,3746 7016,3812 ; 7465,3022 7465,3493 8197,3493 8200,3496 8200,3995 ; 7692,4585 7692,5466 ; 7890,4512 7890,3997 ; 7896,4062 8046,4062 8046,3999 ; 8855,3997 7890,3997 ; 6012,4899 6852,4899 6852,5199 6012,5199 6012,4899
  text "mcHF QRP Transceiver" at 6100,5109 h32
  text "RF board, rev 0.6.3, M0NKA" at 6029,5049 h32
  text "25 March 2019" at 6446,4994 h32
  text "www.m0nka.co.uk" at 6191.64,4948 h32
  text "ANT Switch" at 3570,4710 h32
  text "PA Bias" at 2952,4602 h32
  text "Quad" at 7909,4015 h32
  text "TX mixer" at 6762,3767 h32
  text "PWR/SWR Meter" at 2882,3520 h32
  text "LPF" at 5181,3035 h32
  text "BPF" at 6196,3034 h32
Bottom Overlay:
  lines w5: 6498.86,5456.27 6498.86,5452.14 6507,5444 6507,5283 6535.42,5283 6542,5276.42
  lines w10: 2718,4554 2862,4554 2862,4614 ; 2718,4617 2718,3012 4752,3012 ; 2718,4620 4752,4620 ; 4374,4626 4374,4686 4512,4686 ; 4512,4620 4512,5580 ; 4752,3083.08 4752,4619 6370,4619 ; 4752,3084 4752,3012 ; 4952,3017 4952,3099 ; 4955,3100 5289,3100 ; 5007,5466 5346.53,5466 5346.7,5465.83 5346.7,5388 5673.91,5388 ; 5290.92,3012 5290.92,4619 ; 5676,4621 5676,5462 ; 5676.42,4824 5676.42,4678.58 5677,4678 6175,4678 6175,4621 ; 6194,3013 6194,3068 6392,3068 ; 6371,4619 6393,4597 6393,3012 4752,3012 ; 6394,4391 8004,4391 8004,5475 ; 8004,5058 8010,5052 8076,5052 8076,5226 8004,5226 ; 9057,3021 9057,3102 ; 9058,3102 9134,3102 ; 2062,3523 2140,3523 2140,3769 2062,3769 2062,3523 ; 7344,3028 7344,3846.08 7367.92,3870 9138,3870 9138,3018 7354,3018 7344,3028
  text "PA driver" at 5637,5412.7 h32
  text "Power" at 8022,5064 h32 r270
  text "PA" at 4444,4637 h32
  text "RX mixer" at 6084.34,4633.86 h32
  text "LPF" at 2846,4570 h32
  text "PWR/SWR" at 2086,3541 h32 r270
  text "TX Preamp" at 5261,3051 h32
  text "LO" at 9124,3051 h32
  text "BPF" at 6291,3024 h32

## Text inside footprints (layer, text, board x,y; h text height)
K1: Bottom Overlay "2G/2F" at 4166.9,4910.9 h32
K2: Top Overlay "2G/2F" at 3896.9,4311.1 h32 r180
K3: Top Overlay "2G/2F" at 3111.1,3153.1 h32 r90
K4: Top Overlay "2G/2F" at 3788.9,3290.9 h32 r270
T7: Bottom Overlay "1T" at 2999.46,4993.48 h60 r180; Bottom Overlay "1T" at 2999.46,4836 h60 r180; Bottom Overlay "3T" at 3304.58,4816.31 h60 r180; Bottom Overlay "3T" at 3304.58,5003.32 h60 r180